# Altium PCB SLAVE_HW.PcbDoc (part 1 of 2)
Units mm, origin at the board's own origin, x right, y up, seen from the top; angles counter-clockwise.
Board outline 140 x 52 mm, 2 copper layers (Top Layer, Bottom Layer); 186 components, 129 nets, 475 pads, 0 vias.
Unrouted connection lines stored in the file: 330.
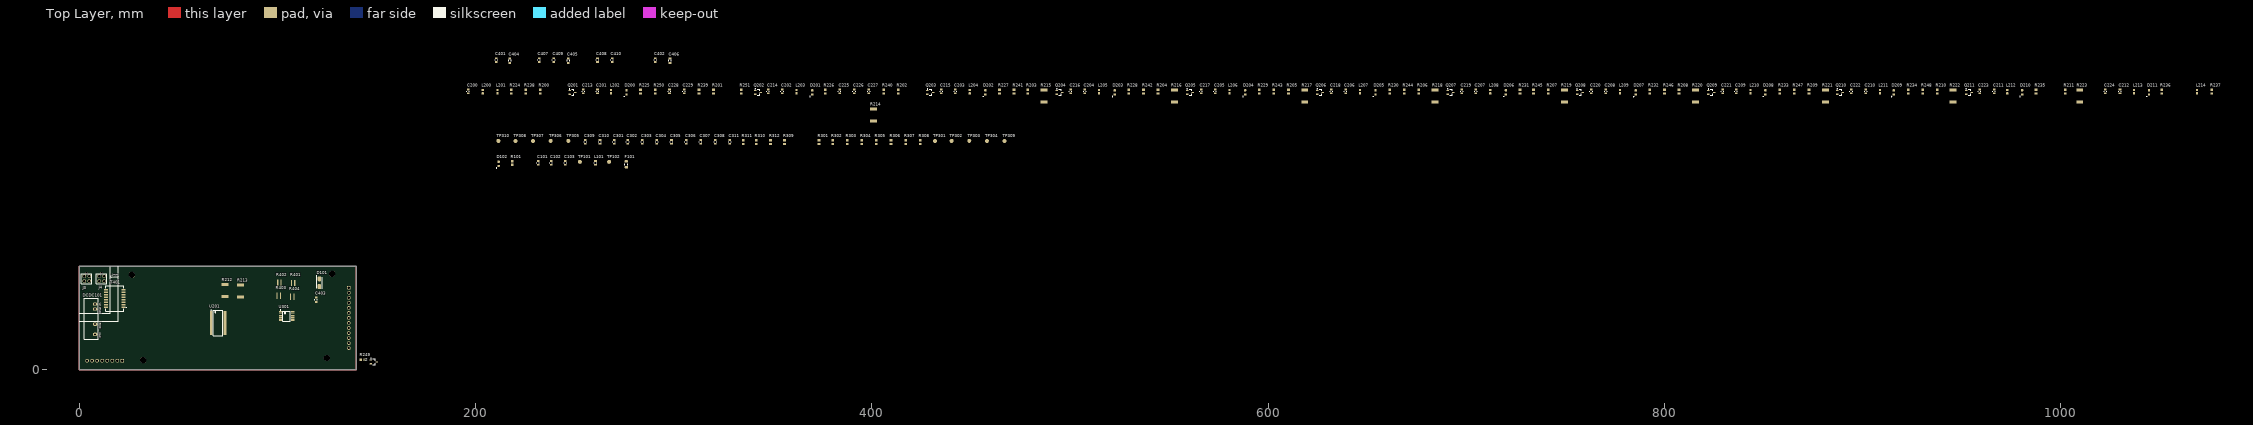
[diagram p0: Top Layer view]
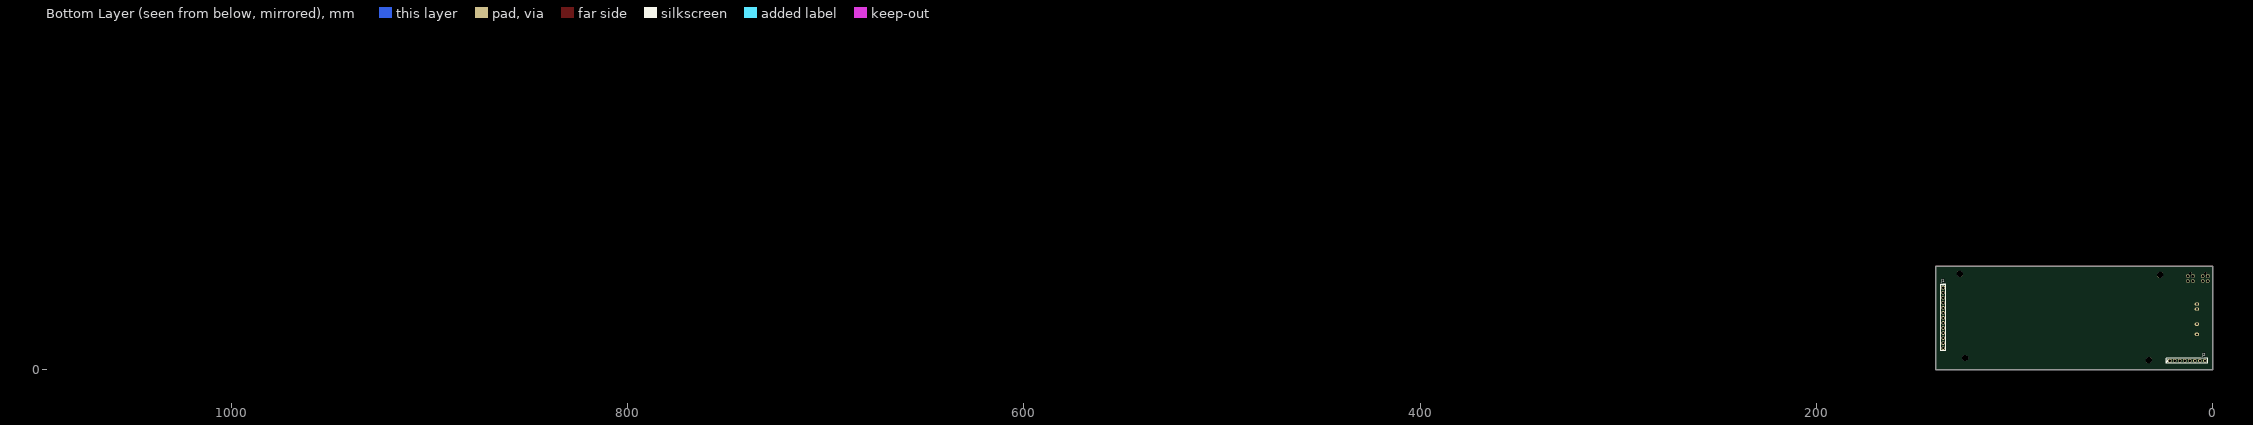
[diagram p1: Bottom Layer view, seen from below]

## Layer stack, top to bottom
Top Solder: solder mask 0.0102, Solder Resist, Dk 3.5
Top Layer: signal copper 0.0356
Dielectric 1: dielectric 0.32, FR-4, Dk 4.8
Bottom Layer: signal copper 0.0356
Bottom Solder: solder mask 0.0102, Solder Resist, Dk 3.5

## Board outline
0,0 140,0 140,52 0,52

## Design rules (kind name [scope] priority, off if disabled: settings)
Clearance [All] p1: gap=0.254 ignorepadtopadclearanceinfootprint=FALSE except(0: Arc-Hole Track-Hole SMDPad-Hole THPad-Hole Via-Hole Fill-Hole Poly-Hole Region-Hole Text-Hole)
PolygonConnect [All] p1: connectstyle=Relief reliefconductorwidth=0.254 reliefentries=4 polygonreliefangle="90 Angle" airgapwidth=0.254
RoutingVias [All] p1: holewidth=0.711 width=1.27 viastyle="Through Hole" minholewidth=0.711 minwidth=1.27 maxholewidth=0.711 maxwidth=1.27
SolderMaskExpansion [All] p1: expansion=0.102 istentingtop=FALSE
Width [All] p1: maxlimit=0.254 minlimit=0.254 preferedwidth=0.254
30 further rules are at their usual default settings.

## Classes and differential pairs
component class Temperatures: C301 C302 C303 C304 C305 C306 C307 C308 C309 C310 C311 R301 R302 R303 R304 R305 R306 R307 R308 R309 R310 R311 R312 TP301 TP302 TP303 TP304 TP305 TP306 TP307 TP308 TP309 TP310 U301
component class Supply: C101 C102 C103 D101 D102 DCDC101 F101 L101 R101 TP101 TP102
component class SLAVE_HW: J1 J2 J3 J4
component class Communication: C401 C402 C403 C404 C405 C406 C407 C408 C409 C410 R401 R402 R403 R404 T401
component class Balancing: 2 C200 C201 C202 C203 C204 C205 C206 C207 C208 C209 C210 C211 C212 C213 C214 C215 C216 C217 C218 C219 C220 C221 C222 C223 C224 C225 C226 C227 C228 C229 D200 D201 D202 D203 D204 D205 D206 D207 D208 D209 D210 D211 L200 L201 L202 L203 L204 L205 L206 L207 L208 L209 L210 L211 L212 L213 L214 Q202 Q204 Q206 Q208 Q210 R200 R201 R202 R203 R204 R205 R206 R207 R208 R209 R210 R211 R212 R213 R214 R215 R216 R217 R218 R219 R220 R221 R222 R223 R224 R225 R226 R227 R228 R229 R230 R231 R232 R233 R234 R235 R236 R237 R238 R239 R240 R241 R242 R243 R244 R245 R246 R247 R248 R250 R251 U201

## Components (designator, comment, footprint, x,y, rotation, side; value= is the part's Value field where it differs from the comment)
2 "BSS308PE" TRT-PCH-2/30-BSS 148.717,3.81 r0 top (schematic designator Q212)
C101 "4.7uF" C0805FNPC-R 231.648,104.306 r90 top
C102 "4.7uF" C0805FNPC-R 238.252,104.306 r90 top
C103 "4.7uF" C0805FNPC-R 245.364,104.306 r90 top
C200 "885012207092" C0805FNPC-R 196.342,140.335 r90 top
C201 "885012207092" C0805FNPC-R 261.62,140.335 r90 top
C202 "885012207092" C0805FNPC-R 354.838,140.335 r90 top
C203 "885012207092" C0805FNPC-R 442.214,140.335 r90 top
C204 "885012207092" C0805FNPC-R 507.492,140.335 r90 top
C205 "885012207092" C0805FNPC-R 573.278,140.335 r90 top
C206 "885012207092" C0805FNPC-R 639.064,140.335 r90 top
C207 "885012207092" C0805FNPC-R 704.85,140.335 r90 top
C208 "885012207092" C0805FNPC-R 770.382,140.335 r90 top
C209 "885012207092" C0805FNPC-R 836.168,140.335 r90 top
C210 "885012207092" C0805FNPC-R 901.573,140.335 r90 top
C211 "885012207092" C0805FNPC-R 966.343,140.335 r90 top
C212 "885012207092" C0805FNPC-R 1029.843,140.335 r90 top
C213 "885012207092" C0805FNPC-R 254.508,140.335 r90 top
C214 "885012207092" C0805FNPC-R 347.726,140.335 r90 top
C215 "885012207092" C0805FNPC-R 435.102,140.335 r90 top
C216 "885012207092" C0805FNPC-R 500.38,140.335 r90 top
C217 "885012207092" C0805FNPC-R 566.166,140.335 r90 top
C218 "885012207092" C0805FNPC-R 631.952,140.335 r90 top
C219 "885012207092" C0805FNPC-R 697.738,140.335 r90 top
C220 "885012207092" C0805FNPC-R 763.016,140.335 r90 top
C221 "885012207092" C0805FNPC-R 829.31,140.335 r90 top
C222 "885012207092" C0805FNPC-R 894.207,140.335 r90 top
C223 "885012207092" C0805FNPC-R 958.977,140.335 r90 top
C224 "885012207092" C0805FNPC-R 1022.477,140.335 r90 top
C225 "885012207103" C0805FNPC-R 383.794,140.335 r90 top
C226 "885012207103" C0805FNPC-R 391.16,140.335 r90 top
C227 "885012207103" C0805FNPC-R 398.526,140.335 r90 top
C228 "885012207098" C0805FNPC-R 297.942,140.335 r90 top
C229 "885012207092" C0805FNPC-R 305.308,140.335 r90 top
C301 "885012207098" C0805FNPC-R 270.002,114.847 r90 top
C302 "885012207098" C0805FNPC-R 276.86,114.847 r90 top
C303 "885012207098" C0805FNPC-R 284.226,114.847 r90 top
C304 "885012207098" C0805FNPC-R 291.592,114.847 r90 top
C305 "885012207098" C0805FNPC-R 298.958,114.847 r90 top
C306 "885012207098" C0805FNPC-R 306.324,114.847 r90 top
C307 "885012207098" C0805FNPC-R 313.69,114.847 r90 top
C308 "885012207098" C0805FNPC-R 321.056,114.847 r90 top
C309 "885012207092" C0805FNPC-R 255.524,114.847 r90 top
C310 "885012207103" C0805FNPC-R 262.89,114.847 r90 top
C311 "885012207103" C0805FNPC-R 328.422,114.847 r90 top
C401 "885012207092" C0805FNPC-R 210.566,156.083 r90 top
C402 "885012207092" C0805FNPC-R 290.83,156.083 r90 top
C403 "885012007057" C0805FNPC-W 119.634,35.179 r90 top
C404 "885012007057" C0805FNPC-W 217.424,155.829 r90 top
C405 "885012007057" C0805FNPC-W 246.888,155.829 r90 top
C406 "885012007057" C0805FNPC-W 298.196,155.829 r90 top
C407 "885012207092" C0805FNPC-R 232.156,156.083 r90 top
C408 "885012207092" C0805FNPC-R 261.62,156.083 r90 top
C409 "885012207092" C0805FNPC-R 239.522,156.083 r90 top
C410 "885012207092" C0805FNPC-R 268.986,156.083 r90 top
D101 "824501600" DTVS-DO-214AC 121.285,43.815 r90 top
D102 "150080GS75000" LED_0805_WE 211.709,103.798 r90 top
D200 "150080YS75000" LED_0805_WE 276.225,139.827 r90 top
D201 "150080YS75000" LED_0805_WE 369.951,139.827 r90 top
D202 "150080YS75000" LED_0805_WE 457.327,139.827 r90 top
D203 "150080YS75000" LED_0805_WE 522.605,139.827 r90 top
D204 "150080YS75000" LED_0805_WE 588.391,139.827 r90 top
D205 "150080YS75000" LED_0805_WE 654.177,139.827 r90 top
D206 "150080YS75000" LED_0805_WE 719.963,139.827 r90 top
D207 "150080YS75000" LED_0805_WE 785.495,139.827 r90 top
D208 "150080YS75000" LED_0805_WE 850.9,139.827 r90 top
D209 "150080YS75000" LED_0805_WE 915.67,139.827 r90 top
D210 "150080YS75000" LED_0805_WE 980.44,139.827 r90 top
D211 "150080YS75000" LED_0805_WE 1044.448,139.827 r90 top
DCDC101 "DCDC-5V/5V-0.2A" F_S-1WR3 8.128,25.4 r270 top
F101 "0437001.WRA" Fuse_1206 276.225,103.544 r90 top
J1 "61301311121" J_Pinheader_1x13 136.144,28.575 r180 bottom
J2 "61301211121" J_Pinheader_1x8 9.144,4.445 r90 bottom
J3 "J_NanoFit_2x2" J_NanoFit_2x2_v 3.937,46.565 r0 top
J4 "J_NanoFit_2x2" J_NanoFit_2x2_v 11.43,46.565 r0 top
L101 "L_Ferrite_Bread_6.8mH" C0805FNPC-R 260.604,104.306 r90 top
L200 "782853561" L_Ferrite_bead_0805 203.708,140.208 r90 top
L201 "782853561" L_Ferrite_bead_0805 211.074,140.208 r90 top
L202 "782853561" L_Ferrite_bead_0805 268.478,140.208 r90 top
L203 "782853561" L_Ferrite_bead_0805 362.077,140.208 r90 top
L204 "782853561" L_Ferrite_bead_0805 449.453,140.208 r90 top
L205 "782853561" L_Ferrite_bead_0805 514.731,140.208 r90 top
L206 "782853561" L_Ferrite_bead_0805 580.517,140.208 r90 top
L207 "782853561" L_Ferrite_bead_0805 646.303,140.208 r90 top
L208 "782853561" L_Ferrite_bead_0805 712.089,140.208 r90 top
L209 "782853561" L_Ferrite_bead_0805 777.621,140.208 r90 top
L210 "782853561" L_Ferrite_bead_0805 843.407,140.208 r90 top
L211 "782853561" L_Ferrite_bead_0805 908.685,140.208 r90 top
L212 "782853561" L_Ferrite_bead_0805 972.947,140.208 r90 top
L213 "782853561" L_Ferrite_bead_0805 1036.955,140.208 r90 top
L214 "782853561" L_Ferrite_bead_0805 1068.705,140.208 r90 top
Q201 "BSS308PE" TRT-PCH-2/30-BSS 248.92,139.827 r0 top
Q202 "BSS308PE" TRT-PCH-2/30-BSS 342.646,139.827 r0 top
Q203 "BSS308PE" TRT-PCH-2/30-BSS 429.514,139.827 r0 top
Q204 "BSS308PE" TRT-PCH-2/30-BSS 494.792,139.827 r0 top
Q205 "BSS308PE" TRT-PCH-2/30-BSS 560.578,139.827 r0 top
Q206 "BSS308PE" TRT-PCH-2/30-BSS 626.237,139.827 r0 top
Q207 "BSS308PE" TRT-PCH-2/30-BSS 692.023,139.827 r0 top
Q208 "BSS308PE" TRT-PCH-2/30-BSS 757.301,139.827 r0 top
Q209 "BSS308PE" TRT-PCH-2/30-BSS 823.595,139.827 r0 top
Q210 "BSS308PE" TRT-PCH-2/30-BSS 888.619,139.827 r0 top
Q211 "BSS308PE" TRT-PCH-2/30-BSS 953.643,139.827 r0 top
R101 "CR0805-JW-102ELF" R0805FTK 218.567,104.179 r90 top
R200 "CR0805-FX-4700GLF" R0805FTK 232.791,140.208 r90 top
R201 "CR0805-FX-4700GLF" R0805FTK 320.167,140.208 r90 top
R202 "CR0805-FX-4700GLF" R0805FTK 413.385,140.208 r90 top
R203 "CR0805-FX-4700GLF" R0805FTK 478.663,140.208 r90 top
R204 "CR0805-FX-4700GLF" R0805FTK 544.449,140.208 r90 top
R205 "CR0805-FX-4700GLF" R0805FTK 610.235,140.208 r90 top
R206 "CR0805-FX-4700GLF" R0805FTK 676.021,140.208 r90 top
R207 "CR0805-FX-4700GLF" R0805FTK 741.299,140.208 r90 top
R208 "CR0805-FX-4700GLF" R0805FTK 807.339,140.208 r90 top
R209 "CR0805-FX-4700GLF" R0805FTK 872.871,140.208 r90 top
R210 "CR0805-FX-4700GLF" R0805FTK 937.641,140.208 r90 top
R211 "CR0805-FX-4700GLF" R0805FTK 1002.157,140.208 r90 top
R212 "352115RFT" R2512FTK 73.66,39.83 r90 top value=15R
R213 "352115RFT" R2512FTK 81.407,39.576 r90 top value=15R
R214 "352115RFT" R2512FTK 400.812,128.397 r90 top value=15R
R215 "352115RFT" R2512FTK 486.918,138.049 r90 top value=15R
R216 "352115RFT" R2512FTK 552.704,138.049 r90 top value=15R
R217 "352115RFT" R2512FTK 618.49,138.049 r90 top value=15R
R218 "352115RFT" R2512FTK 684.276,138.049 r90 top value=15R
R219 "352115RFT" R2512FTK 749.554,138.049 r90 top value=15R
R220 "352115RFT" R2512FTK 815.594,138.049 r90 top value=15R
R221 "352115RFT" R2512FTK 881.126,138.049 r90 top value=15R
R222 "352115RFT" R2512FTK 945.515,138.049 r90 top value=15R
R223 "352115RFT" R2512FTK 1009.523,138.049 r90 top value=15R
R224 "CR0805-FX-1000ELF" R0805FTK 218.059,140.208 r90 top
R225 "CR0805-FX-1000ELF" R0805FTK 283.337,140.208 r90 top
R226 "CR0805-FX-1000ELF" R0805FTK 376.555,140.208 r90 top
R227 "CR0805-FX-1000ELF" R0805FTK 464.439,140.208 r90 top
R228 "CR0805-FX-1000ELF" R0805FTK 529.717,140.208 r90 top
R229 "CR0805-FX-1000ELF" R0805FTK 595.503,140.208 r90 top
R230 "CR0805-FX-1000ELF" R0805FTK 661.289,140.208 r90 top
R231 "CR0805-FX-1000ELF" R0805FTK 727.075,140.208 r90 top
R232 "CR0805-FX-1000ELF" R0805FTK 792.607,140.208 r90 top
R233 "CR0805-FX-1000ELF" R0805FTK 858.139,140.208 r90 top
R234 "CR0805-FX-1000ELF" R0805FTK 922.909,140.208 r90 top
R235 "CR0805-FX-1000ELF" R0805FTK 987.425,140.208 r90 top
R236 "CR0805-FX-1000ELF" R0805FTK 1050.925,140.208 r90 top
R237 "CR0805-FX-1000ELF" R0805FTK 1076.071,140.208 r90 top
R238 "CR0805-JW-102ELF" R0805FTK 225.425,140.208 r90 top
R239 "CR0805-JW-102ELF" R0805FTK 312.801,140.208 r90 top
R240 "CR0805-JW-102ELF" R0805FTK 406.019,140.208 r90 top
R241 "CR0805-JW-102ELF" R0805FTK 471.805,140.208 r90 top
R242 "CR0805-JW-102ELF" R0805FTK 537.083,140.208 r90 top
R243 "CR0805-JW-102ELF" R0805FTK 602.869,140.208 r90 top
R244 "CR0805-JW-102ELF" R0805FTK 668.655,140.208 r90 top
R245 "CR0805-JW-102ELF" R0805FTK 733.933,140.208 r90 top
R246 "CR0805-JW-102ELF" R0805FTK 799.973,140.208 r90 top
R247 "CR0805-JW-102ELF" R0805FTK 865.505,140.208 r90 top
R248 "CR0805-JW-102ELF" R0805FTK 930.275,140.208 r90 top
R249 "CR0805-JW-102ELF" R0805FTK 143.129,4.953 r0 top
R250 "CR0805-JW-102ELF" R0805FTK 290.703,140.208 r90 top
R251 "CR0805-JW-102ELF" R0805FTK 334.137,140.208 r90 top
R301 "CR0805-JW-103ELF" R0805FTK 373.38,114.72 r90 top
R302 "CR0805-JW-103ELF" R0805FTK 380.238,114.72 r90 top
R303 "CR0805-JW-103ELF" R0805FTK 387.604,114.72 r90 top
R304 "CR0805-JW-103ELF" R0805FTK 394.97,114.72 r90 top
R305 "CR0805-JW-103ELF" R0805FTK 402.336,114.72 r90 top
R306 "CR0805-JW-103ELF" R0805FTK 409.702,114.72 r90 top
R307 "CR0805-JW-103ELF" R0805FTK 417.068,114.72 r90 top
R308 "CR0805-JW-103ELF" R0805FTK 424.434,114.72 r90 top
R309 "CR0805-JW-103ELF" R0805FTK 355.981,114.72 r90 top
R310 "CR0805-JW-103ELF" R0805FTK 341.757,114.72 r90 top
R311 "CR0805-JW-103ELF" R0805FTK 335.153,114.72 r90 top
R312 "CR0805-FX-1000ELF" R0805FTK 348.869,114.72 r90 top
R401 "47R" "R0612 normal" 107.989,43.688 r0 top
R402 "47R" "R0612 normal" 101.092,43.815 r0 top
R403 "47R" "R0612 normal" 100.799,37.211 r0 top
R404 "47R" "R0612 normal" 107.608,36.703 r0 top
T401 "7490140117C" 7490140117C 18.034,35.814 r90 top
TP101 "TestPoint" TestPoint 252.73,104.814 r90 top
TP102 "TestPoint" TestPoint 267.462,104.814 r90 top
TP301 "TestPoint" TestPoint 431.927,115.355 r90 top
TP302 "TestPoint" TestPoint 440.309,115.355 r90 top
TP303 "TestPoint" TestPoint 449.199,115.355 r90 top
TP304 "TestPoint" TestPoint 458.089,115.355 r90 top
TP305 "TestPoint" TestPoint 246.888,115.355 r90 top
TP306 "TestPoint" TestPoint 237.998,115.355 r90 top
TP307 "TestPoint" TestPoint 229.108,115.355 r90 top
TP308 "TestPoint" TestPoint 220.218,115.355 r90 top
TP309 "TestPoint" TestPoint 466.979,115.355 r90 top
TP310 "TestPoint" TestPoint 211.582,115.355 r90 top
U201 "LTC6811-1" U_LTC6811G-2 70.175,23.475 r0 top
U301 "CD4051B-Q1" CD4051B-Q1 104.775,26.924 r0 top

## Footprints (in the part's own frame and the unit in brackets; to place one, negate y for a bottom-side part, rotate by r counter-clockwise, add the part's x,y. Pads: shape width x height; smd on the part's side, far side on the other; paste and mask are expansions set on the pad)
7490140117C [mm] "SMD LAN Transformers, body 12.7x8.8mm, 16-Leads"
  rect 0.76x1.9 smd: 1(-4.445,-4.4) 2(-3.175,-4.4) 3(-1.905,-4.4) 4(-0.635,-4.4) 5(0.635,-4.4) 6(1.905,-4.4) 7(3.175,-4.4) 8(4.445,-4.4) 9(4.445,4.4) 10(3.175,4.4) 11(1.905,4.4) 12(0.635,4.4) 13(-0.635,4.4) 14(-1.905,4.4) 15(-3.175,4.4) 16(-4.445,4.4)
  silkscreen extent -6.48,-5.92 6.48,4.52, body extent -6.35,-4.7 6.35,4.7, height 5.8
C0805FNPC-R [mm]
  rect 0.9x1.3 smd: 1(-0.95,0) 2(0.95,0)
  silkscreen extent -0.15,-0.65 0.15,0.65, body extent -1.03,-0.63 0.97,0.63, height 0.96
C0805FNPC-W [mm]
  rect 0.9x1.3 smd: 1(-1.15,0) 2(1.15,0)
  silkscreen extent -0.35,-0.65 0.35,0.65, body extent -1,-0.63 1,0.63, height 0.96
CD4051B-Q1 [mm]
  rect 1.6x0.45 smd: 1(-3.05,2.275) 2(-3.05,1.625) 3(-3.05,0.975) 4(-3.05,0.325) 5(-3.05,-0.325) 6(-3.05,-0.975) 7(-3.05,-1.625) 8(-3.05,-2.275) 9(3.05,-2.275) 10(3.05,-1.625) 11(3.05,-0.975) 12(3.05,-0.325) 13(3.05,0.325) 14(3.05,0.975) 15(3.05,1.625) 16(3.05,2.275)
  silkscreen extent -3.17,-2.55 1.85,3.17, body extent -3.2,-2.55 3.2,2.55, height 1.2
DTVS-DO-214AC [mm] "Molded Diode, 2-Leads, Body 5,11x2,67mm, IPC Medium Density"
  rrect50% 2.5x1.7 smd: 1(-1.975,0) 2(1.975,0)
  silkscreen extent -2.7,-1.4 3.47,1.52, body extent -2.56,-1.34 2.56,1.34, height 2.5
F_S-1WR3 [mm]
  oval 1.6x2.3 hole 1: 1(-7.62,0) 2(-5.08,0) 5(2.54,0) 7(7.62,0)
  silkscreen extent -10.47,-5.6 10.17,1.7, body extent -9.95,-5.12 9.7,0.88, height 10.16
Fuse_1206 [mm] "Chip Resistor, 2-Leads, Body 3,20x1,58mm, IPC Medium Density"
  rrect50% 1.25x1.75 smd: 1(-1.425,0) 2(1.425,0)
  silkscreen extent -0.4,-0.77 0.4,0.77, body extent -1.6,-0.79 1.6,0.79, height 0.86
J_NanoFit_2x2_v [mm]
  round 1.8 hole 1.2: 1(1.27,0.552) 3(1.23,-1.949) 4(-1.27,-1.949)
  rect 1.6x1.6 hole 1.2: 2(-1.27,0.552)
  round 1.4 hole 1.4: 5(0,1.949)
  silkscreen extent -2.79,-3.2 2.54,1.8, body extent -3.02,-3.61 2.92,5.23, height 9.92
J_Pinheader_1x8 [mm]
  rrect50% 1.8x1.8 hole 1.1: 1(0,12.7)
  round 1.8 hole 1.1: 2(0,10.16) 3(0,7.62) 4(0,5.08) 5(0,2.54) 6(0,0) 7(0,-2.54) 8(0,-5.08)
  silkscreen extent -1.27,-6.5 1.27,14.5, body extent -1.26,-6.32 1.28,14, height 8.77
J_Pinheader_1x13 [mm]
  rrect50% 1.8x1.8 hole 1.1: 1(0,12.7)
  round 1.8 hole 1.1: 2(0,10.16) 3(0,7.62) 4(0,5.08) 5(0,2.54) 6(0,0) 7(0,-2.54) 8(0,-5.08) 9(0,-7.62) 10(0,-10.16) 11(0,-12.7) 12(0,-15.24) 13(0,-17.78)
  silkscreen extent -1.27,-19.04 1.27,14.5, body extent -1.27,-19.05 1.27,13.97, height 8.57
L_Ferrite_bead_0805 [mm] "Chip Inductor, 2-Leads, Body 1,60x0,80mm, IPC Low Density"
  rrect50% 1.22x1.08 smd: 1(-0.84,0) 2(0.84,0)
  body extent -0.88,-0.48 0.87,0.47, height 0.65
LED_0805_WE [mm] "SODFL, 2-Leads, Body 1,60x3,20mm, IPC Medium Density"
  rrect50% 1.1x1.2 smd: A(1.05,0) K(-1.05,0)
  silkscreen extent -2.15,1.05 -2.05,1.15, body extent -1,-0.62 1,0.63, height 0.7
"R0612 normal" [mm]
  rect 0.6x3.2 smd: 1(-0.85,0) 2(0.85,0)
  body extent -1.11,-1.6 1.11,1.6, height 0.75
R0805FTK [mm] "Chip Resistor, 2-Leads, Body 2,00x1,25mm, IPC Medium Density"
  rect 1.15x1.35 smd: 1(-0.925,0) 2(0.925,0)
  body extent -1,-0.63 1,0.63, height 0.65
R2512FTK [mm]
  rect 1.5x3.5 smd: 1(-3,0) 2(3,0)
  body extent -3.15,-1.6 3.15,1.6, height 0.66
TestPoint [mm]
  round 2 smd: 1(0,0)
TRT-PCH-2/30-BSS [mm] "SOT23, 3-Leads, Body 2,90x2,80mm, Pitch 0,95mm, IPC Low Density"
  rrect50% 1.25x0.65 smd: D(1.425,0) G(-1.425,0.95) S(-1.425,-0.95)
  silkscreen extent -1.55,-1.5 0.8,1.95, body extent -1.4,-1.45 1.4,1.45, height 1.06
U_LTC6811G-2 [mm] "SSOP, 48-Leads, Body 12,80x5,30mm, Pitch 0,50mm, IPC Medium Density"
  rrect50% 1.37x0.3 smd: 1(-3.5,5.75) 2(-3.5,5.25) 3(-3.5,4.75) 4(-3.5,4.25) 5(-3.5,3.75) 6(-3.5,3.25) 7(-3.5,2.75) 8(-3.5,2.25) 9(-3.5,1.75) 10(-3.5,1.25) 11(-3.5,0.75) 12(-3.5,0.25) 13(-3.5,-0.25) 14(-3.5,-0.75) 15(-3.5,-1.25) 16(-3.5,-1.75) 17(-3.5,-2.25) 18(-3.5,-2.75) 19(-3.5,-3.25) 20(-3.5,-3.75) 21(-3.5,-4.25) 22(-3.5,-4.75) 23(-3.5,-5.25) 24(-3.5,-5.75) 25(3.5,-5.75) 26(3.5,-5.25) 27(3.5,-4.75) 28(3.5,-4.25) 29(3.5,-3.75) 30(3.5,-3.25) 31(3.5,-2.75) 32(3.5,-2.25) 33(3.5,-1.75) 34(3.5,-1.25) 35(3.5,-0.75) 36(3.5,-0.25) 37(3.5,0.25) 38(3.5,0.75) 39(3.5,1.25) 40(3.5,1.75) 41(3.5,2.25) 42(3.5,2.75) 43(3.5,3.25) 44(3.5,3.75) 45(3.5,4.25) 46(3.5,4.75) 47(3.5,5.25) 48(3.5,5.75)
  silkscreen extent -3.62,-6.55 2.4,6.57, body extent -3.9,-6.4 3.9,6.4, height 2

## Part data
2 Q201 Q202 Q203 Q204 Q205 Q206 Q207 Q208 Q209 Q210 Q211: library part TRT-PCH-2/30-BSS, "Infineon’s highly innovative OptiMOS™ families include p-channel power MOSFETs, SOT-23-3, RoHS", Case/Package=TO-236-3, Continuous Drain Current (ID)=2A, Drain to Source Voltage (Vdss)=30V, Gate to Source Voltage (Vgs)=20V, Input Capacitance=500pF, Manufacturer=Infineon, Manufacturer Part Number=BSS308PEH6327, Max Operating Temperature=150°C, Max Power Dissipation=500mW, Min Operating Temperature=-55°C, Package Quantity=1, Supplier Part Number 1=8235500, Threshold Voltage=-1.5V, .Creator=DO, Category=MOSFETs, ComponentLink1Description=datasheet, ComponentLink1URL=https://datasheet.ciiva.com/6379/infineon-bss308pe-ds-v02-03-en-6379920.pdf?src-supplier=Digi-Key, ComponentLink2Description=https://datasheet.ciiva.com/11171/infineon-bss308pe-ds-v02-03-en-11171385.pdf?src-supplier=Avnet, ComponentLink2URL=https://datasheet.ciiva.com/11171/infineon-bss308pe-ds-v02-03-en-11171385.pdf?src-supplier=Avnet, Fall Time=2.8ns, Mount="Surface Mount", Number of Pins=3, Packaging="Tape and Reel", Pricing 1="50=0,50300, 100=0,26400, 250=0,25900, 500=0,25200, 1000=0,24700 (USD)", Rds On Max=80mR, REACH SVHC="No SVHC", Rise Time=7.7ns, RoHS=Yes, Series=OptiMOS™, Stock 1=4000, Supplier 1=RSComponents, Turn-Off Delay Time=15.3ns, Turn-On Delay Time=5.6ns
C101 C102 C103: library part C4.7uF-25V, "Multilayer Ceramic Capacitor, Wcap-Csgp Series, 4.7 F, 20%, X5R, 25 V, 0805 [2012 Metric] Rohs Compliant: Yes", Manufacturer="Wurth Electronics", Manufacturer Part Number=885012107018, Supplier Part Number 1=1813478, Category="Ceramic Capacitors", ComponentLink1Description=http://www.farnell.com/datasheets/1958455.pdf?src-supplier=Farnell, ComponentLink1URL=http://www.farnell.com/datasheets/1958455.pdf?src-supplier=Farnell, ComponentLink2Description=http://www.farnell.com/datasheets/1958455.pdf?src-supplier=Element14, ComponentLink2URL=http://www.farnell.com/datasheets/1958455.pdf?src-supplier=Element14, ComponentLink3Description=http://www.farnell.com/datasheets/1958455.pdf?src-supplier=Newark, ComponentLink3URL=http://www.farnell.com/datasheets/1958455.pdf?src-supplier=Newark, ComponentLink4Description=https://katalog.we-online.de/pbs/datasheet/885012107018.pdf?src-supplier=Digi-Key, ComponentLink4URL=https://katalog.we-online.de/pbs/datasheet/885012107018.pdf?src-supplier=Digi-Key, Pricing 1="50=0,141, 500=0,093, 1500=0,088 (EUR)", RoHS=Yes, Stock 1=1051, Supplier 1=Rs
C200 C201 C202 C203 C204 C205 C206 C207 C208 C209 C210 C211 C212 C213 C214 C215 C216 C217 C218 C219 C220 C221 C222 C223 C224 C229 C309 C401 C402 C407 C408 C409 C410: library part C10n-50V-0805FNPC-X7R, "Cap, 0.01ΜF, 50V, 10%, X7R, 0805", Capacitance=10nF, Case Code (Imperial)=0805, Case Code (Metric)=2012, Dielectric=X7R, Manufacturer 1="Wurth Electronics", Max Operating Temperature=125°C, Min Operating Temperature=-55°C, Supplier Part Number 1=1813941, Tolerance=10%, Voltage Rating=50V, .Creator=DR, Case/Package=0805, Category="Ceramic Capacitors", ComponentLink1Description=http://www.farnell.com/datasheets/1958497.pdf?src-supplier=Farnell, ComponentLink1URL=http://www.farnell.com/datasheets/1958497.pdf?src-supplier=Farnell, ComponentLink2Description=http://www.farnell.com/datasheets/1958497.pdf?src-supplier=Element14, ComponentLink2URL=http://www.farnell.com/datasheets/1958497.pdf?src-supplier=Element14, ComponentLink3Description=http://www.farnell.com/datasheets/1958497.pdf?src-supplier=Newark, ComponentLink3URL=http://www.farnell.com/datasheets/1958497.pdf?src-supplier=Newark, ComponentLink4Description=https://katalog.we-online.de/pbs/datasheet/885012207092.pdf?src-supplier=Digi-Key, ComponentLink4URL=https://katalog.we-online.de/pbs/datasheet/885012207092.pdf?src-supplier=Digi-Key, Length=0.079inch, Manufacturer Part Number 1=885012207092, Mount="Surface Mount", Packaging="Cut Tape", Pricing 1="4000=0,03200, 12000=0,03100 (USD)", REACH SVHC=Unknown, RoHS=Yes, RoHS Compliant=Yes, Stock 1=1, Supplier 1=RSComponents, Thickness=0.035inch, Voltage Rating (DC)=50V, Width=0.049inch
C225 C226 C227 C310 C311: library part C1u-50V-0805FNPC-X7R, "Multilayer Ceramic Capacitor, Wcap-Csgp Series, 1 F, 10%, X7R, 50 V, 0805 [2012 Metric] Rohs Compliant: Yes", Capacitance=1uF, Case Code (Imperial)=0805, Case Code (Metric)=2012, Dielectric=X7R, Manufacturer 1="Wurth Electronics", Max Operating Temperature=85°C, Min Operating Temperature=-55°C, Supplier Part Number 1=1813523, Tolerance=10%, Voltage Rating=50V, .Creator=GP, Case/Package=0805, Category="Ceramic Capacitors", ComponentLink1Description=http://www.farnell.com/datasheets/1958501.pdf?src-supplier=Farnell, ComponentLink1URL=http://www.farnell.com/datasheets/1958501.pdf?src-supplier=Farnell, ComponentLink2Description=http://www.farnell.com/datasheets/1958501.pdf?src-supplier=Element14, ComponentLink2URL=http://www.farnell.com/datasheets/1958501.pdf?src-supplier=Element14, ComponentLink3Description=https://katalog.we-online.de/pbs/datasheet/885012107003.pdf?src-supplier=Digi-Key, ComponentLink3URL=https://katalog.we-online.de/pbs/datasheet/885012107003.pdf?src-supplier=Digi-Key, ComponentLink4Description=http://www.farnell.com/datasheets/1958501.pdf?src-supplier=Newark, ComponentLink4URL=http://www.farnell.com/datasheets/1958501.pdf?src-supplier=Newark, Length=0.079inch, Manufacturer Part Number 1=885012207103, Mount="Surface Mount", Packaging="Cut Tape", Pricing 1="50=0,27200, 250=0,25300, 500=0,22800, 1250=0,20100, 2500=0,17100 (GBP)", REACH SVHC=Unknown, RoHS=Yes, RoHS Compliant=Yes, Stock 1=5100, Supplier 1=RSComponents, Thickness=0.053inch, Voltage Rating (DC)=50V, Width=0.049inch
C228 C301 C302 C303 C304 C305 C306 C307 C308: library part C100n-50V-0805FNPC-X7R, "Cap, 0.1ΜF, 50V, 10%, X7R, 0805", Capacitance=100nF, Case Code (Imperial)=0805, Case Code (Metric)=2012, Dielectric=X7R, Manufacturer 1="Wurth Electronics", Max Operating Temperature=125°C, Min Operating Temperature=-55°C, Supplier Part Number 1=1813493, Tolerance=10%, Voltage Rating=50V, .Creator=DR, Case/Package=0805, Category="Ceramic Capacitors", ComponentLink1Description=http://www.farnell.com/datasheets/1958498.pdf?src-supplier=Farnell, ComponentLink1URL=http://www.farnell.com/datasheets/1958498.pdf?src-supplier=Farnell, ComponentLink2Description=http://www.farnell.com/datasheets/1958498.pdf?src-supplier=Element14, ComponentLink2URL=http://www.farnell.com/datasheets/1958498.pdf?src-supplier=Element14, ComponentLink3Description=https://katalog.we-online.de/pbs/datasheet/885012207098.pdf?src-supplier=Digi-Key, ComponentLink3URL=https://katalog.we-online.de/pbs/datasheet/885012207098.pdf?src-supplier=Digi-Key, ComponentLink4Description=http://www.farnell.com/datasheets/1958498.pdf?src-supplier=Newark, ComponentLink4URL=http://www.farnell.com/datasheets/1958498.pdf?src-supplier=Newark, Length=0.079inch, Manufacturer Part Number 1=885012207098, Mount="Surface Mount", Packaging="Cut Tape", Pricing 1="100=0,10200, 500=0,07100, 2000=0,06100 (GBP)", REACH SVHC=Unknown, RoHS=Yes, RoHS Compliant=Yes, Stock 1=8000, Supplier 1=RSComponents, Thickness=0.035inch, Voltage Rating (DC)=50V, Width=0.049inch
C403 C404 C405 C406: library part C100p-50V-0805FNPC-C0G/NP0, "Multilayer Ceramic Capacitor, Wcap-Csgp Series, 100 Pf, 5%, C0G / Np0, 50 V, 0805 [2012 Metric] Rohs Compliant: Yes", Capacitance=100pF, Case Code (Imperial)=0805, Case Code (Metric)=2012, Dielectric=C0G, Manufacturer="Wurth Electronics", Max Operating Temperature=125°C, Min Operating Temperature=-55°C, Supplier Part Number 1=1813930, Tolerance=5%, Voltage Rating=50V, .Creator=DR, Case/Package=0805, Category="Ceramic Capacitors", ComponentLink1Description=http://www.farnell.com/datasheets/1958443.pdf?src-supplier=Farnell, ComponentLink1URL=http://www.farnell.com/datasheets/1958443.pdf?src-supplier=Farnell, ComponentLink2Description=https://katalog.we-online.de/pbs/datasheet/885012007057.pdf?src-supplier=Digi-Key, ComponentLink2URL=https://katalog.we-online.de/pbs/datasheet/885012007057.pdf?src-supplier=Digi-Key, ComponentLink3Description=http://www.farnell.com/datasheets/1958443.pdf?src-supplier=Element14, ComponentLink3URL=http://www.farnell.com/datasheets/1958443.pdf?src-supplier=Element14, ComponentLink4Description=http://www.farnell.com/datasheets/1958443.pdf?src-supplier=Newark, ComponentLink4URL=http://www.farnell.com/datasheets/1958443.pdf?src-supplier=Newark, ComponentLink5Description="Where buy it", ComponentLink5URL=https://www.we-online.com/catalog/en/WCAP-CSGP-50VDC#885012007057, Length=0.079inch, Manufacturer Part Number=885012007057, Mount="Surface Mount", Packaging="Cut Tape", Pricing 1="4000=0,03900, 12000=0,03800 (USD)", REACH SVHC=Unknown, RoHS=Yes, RoHS Compliant=Yes, Stock 1=1, Supplier 1=RSComponents, Thickness=0.035inch, Voltage Rating (DC)=50V, Width=0.049inch
D101: library part DTVS-6V-DO-214AC, "TVS diode [Würth Elektronik] 824501600 TVS diode", Clamping Voltage=10.3V, Manufacturer="Wurth Electronics", Max Breakdown Voltage=7.02V, Max Operating Temperature=150°C, Min Operating Temperature=-65°C, Peak Pulse Current=38.8A, Peak Pulse Power=400W, Power Line Protection=No, Resistor Type=Zener, Reverse Standoff Voltage=6V, Supplier Part Number 1=710-824501600, .Creator=DO, Category="TVS Diodes", ComponentLink1Description="Where buy it", ComponentLink1URL=https://www.we-online.com/catalog/en/WE-TVSP?sq=824501600#824501600, ComponentLink2Description=http://www.farnell.com/datasheets/2036401.pdf?src-supplier=Element14, ComponentLink2URL=http://www.farnell.com/datasheets/2036401.pdf?src-supplier=Element14, ComponentLink3Description=https://katalog.we-online.de/pbs/datasheet/824501600.pdf?src-supplier=Digi-Key, ComponentLink3URL=https://katalog.we-online.de/pbs/datasheet/824501600.pdf?src-supplier=Digi-Key, Manufacturer Part Number=824501600, Min Breakdown Voltage=7.02V, Mount="Surface Mount", Number of Bidirectional Channels=1, Number of Pins=2, Packaging="Cut Tape", Polarity=Bidirectional, Pricing 1="1=0,28000, 10=0,26100, 50=0,26100, 100=0,23400, 500=0,20400, 1000=0,17400, 10000=0,17400 (USD)", REACH SVHC=Unknown, RoHS=Yes, RoHS Compliant=Yes, Stock 1=780, Supplier 1=Mouser
D102: library part LEDGS-0805-450, "Led, Green, 520 Nm, 3.2 V, 30 Ma, 450 Mcd Rohs Compliant: Yes", Case Code (Imperial)=0805, Case Code (Metric)=2012, Color=Green, Forward Current=30mA, Forward Voltage=3.2V, Manufacturer 1="Wurth Electronics", Max Operating Temperature=85°C, Min Operating Temperature=-40°C, Package Quantity=4000, Supplier Part Number 1=8154221, Test Current=20mA, .Creator=GP, Case/Package=0805, Category=LEDs, ComponentLink1Description=Datasheet, ComponentLink1URL=https://www.we-online.com/catalog/datasheet/150080GS75000.pdf, ComponentLink2Description="Where buy it", ComponentLink2URL=https://katalog.we-online.de/en/led/WL-SMCW/150080GS75000, ComponentLink3Description=https://datasheet.ciiva.com/29563/150080gs75000-29563008.pdf?src-supplier=Digi-Key, ComponentLink3URL=https://datasheet.ciiva.com/29563/150080gs75000-29563008.pdf?src-supplier=Digi-Key, ComponentLink4Description=https://datasheet.ciiva.com/29279/759434-da-01-en-chipled-0805-w-kl-gruen-150080gs75000-29279039.pdf?src-supplier=Conrad, ComponentLink4URL=https://datasheet.ciiva.com/29279/759434-da-01-en-chipled-0805-w-kl-gruen-150080gs75000-29279039.pdf?src-supplier=Conrad, Dominant Wavelength=520nm, Height=0.7mm, Length=2mm, Lens Style=Clear,Rectangular, Luminous Intensity=450mcd, Manufacturer Part Number 1=150080GS75000, Mount="Surface Mount", Packaging="Cut Tape", Pricing 1="50=0,19300, 500=0,12900, 1000=0,12300, 2000=0,11700, 4000=0,11100 (USD)", REACH SVHC=Unknown, RoHS=Yes, RoHS Compliant=Yes, Stock 1=4350, Supplier 1=RSComponents, Viewing Angle=140°, Wavelength=520nm, Width=1.25mm
D200 D201 D202 D203 D204 D205 D206 D207 D208 D209 D210 D211: library part LEDYS-0805-120, "2 V Yellow LED 2012 (0805) SMD, Wurth Elektronik WL-SMCW 150080YS75000", Case Code (Imperial)=0805, Case Code (Metric)=2012, Color=Yellow, Forward Current=30mA, Forward Voltage=2V, Manufacturer 1="Wurth Electronics", Max Operating Temperature=85°C, Min Operating Temperature=-40°C, Package Quantity=4000, Supplier Part Number 1=8154231, Test Current=20mA, .Creator=DR, Case/Package=0805, Category=LEDs, ComponentLink1Description=Datasheet, ComponentLink1URL=https://www.we-online.com/catalog/datasheet/150080YS75000.pdf, ComponentLink2Description="Where buy it", ComponentLink2URL=https://katalog.we-online.de/en/led/WL-SMCW/150080YS75000, ComponentLink3Description=https://datasheet.ciiva.com/23843/150080ys75000-23843256.pdf?src-supplier=Newark, ComponentLink3URL=https://datasheet.ciiva.com/23843/150080ys75000-23843256.pdf?src-supplier=Newark, ComponentLink4Description=https://datasheet.ciiva.com/29279/759438-da-01-en-chipled-0805-w-kl-gelb-150080ys75000-29279034.pdf?src-supplier=Conrad, ComponentLink4URL=https://datasheet.ciiva.com/29279/759438-da-01-en-chipled-0805-w-kl-gelb-150080ys75000-29279034.pdf?src-supplier=Conrad, ComponentLink5Description=https://datasheet.ciiva.com/22656/1911353-22656971.pdf?src-supplier=Element14, ComponentLink5URL=https://datasheet.ciiva.com/22656/1911353-22656971.pdf?src-supplier=Element14, ComponentLink6Description=https://datasheet.ciiva.com/29563/150080ys75000-29563019.pdf?src-supplier=Digi-Key, ComponentLink6URL=https://datasheet.ciiva.com/29563/150080ys75000-29563019.pdf?src-supplier=Digi-Key, ComponentLink7Description=https://datasheet.ciiva.com/29563/150080ys75000-29563020.pdf?src-supplier=Digi-Key, ComponentLink7URL=https://datasheet.ciiva.com/29563/150080ys75000-29563020.pdf?src-supplier=Digi-Key, ComponentLink8Description=https://datasheet.ciiva.com/29563/150080ys75000-29563021.pdf?src-supplier=Digi-Key, ComponentLink8URL=https://datasheet.ciiva.com/29563/150080ys75000-29563021.pdf?src-supplier=Digi-Key, Dominant Wavelength=590nm, Height=0.7mm, Length=2mm, Lens Style=Clear,Rectangular, Luminous Intensity=120mcd, Manufacturer Part Number 1=150080YS75000, Mount="Surface Mount", Packaging="Tape and Reel", Pricing 1="50=0,19300, 500=0,12900, 750=0,12300, 1500=0,11700, 3000=0,11100 (USD)", REACH SVHC=Unknown, RoHS=Yes, RoHS Compliant=Yes, Stock 1=2100, Supplier 1=RSComponents, Viewing Angle=140°, Wavelength=590nm, Width=1.25mm
DCDC101: "Module DC-DC 5VIN 1-OUT 5V 0.2A 1W 4-Pin SIP Module Bag", Manufacturer=MORNSUN, Manufacturer Part Number=F0505S-1WR3, Supplier Part Number 1=2725-F0505S-1WR3-ND, Category="Board Mount Modules", ComponentLink1Description="New link", Pricing 1="1=2,32, 5=2,288, 10=2,255, 25=2,1884, 50=2,1222, 100=2,0559, 250=1,98956, 500=1,85692 (USD)", RoHS=No, Stock 1=23492, Supplier 1=Digi-Key
F101: library part Fuse_1A_63V_1206, "Fuse Chip Fast Acting 1A 63V SMD Solder Pad 1206 Ceramic T/R Automotive", Case Code (Imperial)=1206, Case Code (Metric)=3216, Current Rating=1A, Manufacturer=Littelfuse, Max Operating Temperature=150°C, Min Operating Temperature=-55°C, Supplier Part Number 1=F10001CT-ND, Voltage Rating (AC)=63V, .Creator=DO, Approvals=CSA,cURus, Case/Package=1206, Category=Fuses, ComponentLink1Description=https://www.littelfuse.com/~/media/electronics/datasheets/fuses/littelfuse_fuse_437a_datasheet.pdf.pdf?src-supplier=Digi-Key, ComponentLink1URL=https://www.littelfuse.com/~/media/electronics/datasheets/fuses/littelfuse_fuse_437a_datasheet.pdf.pdf?src-supplier=Digi-Key, ComponentLink2Description="Where buy it", ComponentLink2URL=https://www.mouser.es/ProductDetail/Littelfuse/0437001WRA?qs=DXv0QSHKF4z9CJhPXjxR%252BA%3D%3D, Fuse Type="Board Mount (Cartridge Style Excluded)", Manufacturer Part Number=0437001.WRA, Mount="Surface Mount", Packaging="Tape and Reel", Pricing 1="1=1,52000, 5=1,47000, 10=1,37600, 50=1,13860, 100=0,94880, 250=0,92508, 500=0,78276, 1000=0,68788 (USD)", RoHS=Yes, Stock 1=5820, Supplier 1=Digi-Key, Voltage Rating (DC)=63V
J1: library part J_Pinheader_1x13, "THT Vertical Pin Header WR-PHD, Pitch 2.54 mm, Single Row, 13 pins", Color=Black, Manufacturer="Wurth Electronics", Category=Connectors, ComponentLink1Description=http://www.farnell.com/cad/1737268.pdf?src-supplier=Element14, ComponentLink1URL=http://www.farnell.com/cad/1737268.pdf?src-supplier=Element14, ComponentLink2Description=https://katalog.we-online.de/em/datasheet/6130xx11121.pdf?src-supplier=Digi-Key, ComponentLink2URL=https://katalog.we-online.de/em/datasheet/6130xx11121.pdf?src-supplier=Digi-Key, Connector Type="Male Pin", Contact Material=Copper, Contact Mating Length=0.236inch, Contact Plating=Gold, Contact Type="Male Pin", Gender=Male, Lead Free="Lead Free", Manufacturer 1="Wurth Electronics", Manufacturer Part Number=61301311121, Mount="Through Hole", Mounting Technology="Through Hole", Number of Contacts=12, Number of Positions=12, Number of Rows=1, Packaging=Bulk, Pitch=0.1inch, Pricing 1="1=0,57000, 10=0,48400, 25=0,40400, 50=0,33700, 100=0,30600, 1000=0,27800 (USD)", Pricing 2="5=0,69, 100=0,358, 375=0,34, 1500=0,324, 3000=0,306 (EUR)", REACH SVHC=Unknown, Reach SVHC Compliant=Unknown, RoHS=Yes, RoHS Compliant=Yes, Series=WR-PHD, Stock 2=90, Supplier 1=Digi-Key, Supplier 2=Rs, Termination=Solder
J2: library part J_Pinheader_1x8, "THT Vertical Pin Header WR-PHD, Pitch 2.54 mm, Single Row, 12 pins", Color=Black, Manufacturer 1="Wurth Electronics", Category=Connectors, ComponentLink1Description=http://www.farnell.com/cad/1737268.pdf?src-supplier=Element14, ComponentLink1URL=http://www.farnell.com/cad/1737268.pdf?src-supplier=Element14, ComponentLink2Description=https://katalog.we-online.de/em/datasheet/6130xx11121.pdf?src-supplier=Digi-Key, ComponentLink2URL=https://katalog.we-online.de/em/datasheet/6130xx11121.pdf?src-supplier=Digi-Key, Connector Type="Male Pin", Contact Material=Copper, Contact Mating Length=0.236inch, Contact Plating=Gold, Gender=Male, Manufacturer Part Number 1=61301211121, Mount="Through Hole", Number of Contacts=12, Number of Positions=12, Number of Rows=1, Packaging=Bulk, Pitch=0.1inch, Pricing 1="1=0,57000, 10=0,48400, 25=0,40400, 50=0,33700, 100=0,30600, 1000=0,27800 (USD)", REACH SVHC=Unknown, RoHS=Yes, RoHS Compliant=Yes, Stock 1=2124, Supplier 1=Digi-Key, Termination=Solder
J3 J4: "Conn Nano-Fit Power HDR 4 POS 2.5mm Solder ST Through Hole 4 Terminal Single Port Tray", Manufacturer 1=Molex, Manufacturer Part Number 1=1053101104, Supplier Part Number 1=2820681, Category=Uncategorized, ComponentLink1Description=https://www.molex.com/pdm_docs/ps/PS-105300-100-001.pdf?src-supplier=Digi-Key, ComponentLink1URL=https://www.molex.com/pdm_docs/ps/PS-105300-100-001.pdf?src-supplier=Digi-Key, Pricing 1="1=1,43000, 10=1,18000, 50=0,74900, 100=0,72900, 500=0,71400, 1000=0,70700 (EUR)", RoHS=Yes, Stock 1=255, Supplier 1=Farnell
L101: "Multilayer Inductor, 6.8Uh, 0.6A, 0805 Rohs Compliant: Yes", Manufacturer="Wurth Electronics", Manufacturer Part Number=74479777268, Category="Fixed Inductors", Pricing 1="5=0,845, 50=0,759, 250=0,658, 500=0,569, 1500=0,528, 3000=0,514, 15000=0,498, 30000=0,48 (EUR)", RoHS=No, Stock 1=2165, Supplier 1=Farnell
L200 L201 L202 L203 L204 L205 L206 L207 L208 L209 L210 L211 L212 L213 L214: library part L_Ferrite_bead_782853561, Case Code (Imperial)=0603, Case Code (Metric)=1608, Current Rating=500mA, DC Resistance (DCR)=210mR, Manufacturer=Murata, Manufacturer Part Number=BLM18EG331TN1D, Max Operating Temperature=125°C, Min Operating Temperature=-55°C, Package Quantity=1, Supplier Part Number 1=490-5913-1-ND, Test Frequency=100MHz, Tolerance=25%, .Creator=GP, Case/Package=0603, Category="Ferrite Beads and Chips", ComponentLink1Description=https://datasheet.ciiva.com/1467/5169-1467232.pdf?src-supplier=Element14, ComponentLink1URL=https://datasheet.ciiva.com/1467/5169-1467232.pdf?src-supplier=Element14, ComponentLink2Description=https://datasheet.ciiva.com/11795/0900766b811b5866-11795405.pdf?src-supplier=RSComponents, ComponentLink2URL=https://datasheet.ciiva.com/11795/0900766b811b5866-11795405.pdf?src-supplier=RSComponents, ComponentLink3Description=https://datasheet.ciiva.com/41449/001172267-da-01-en-drossel-0603-330r-1-6x0-8mm-4000st-41449581.pdf?src-supplier=Conrad, ComponentLink3URL=https://datasheet.ciiva.com/41449/001172267-da-01-en-drossel-0603-330r-1-6x0-8mm-4000st-41449581.pdf?src-supplier=Conrad, ComponentLink4Description=https://datasheet.ciiva.com/1467/5169-1467233.pdf?src-supplier=Element14, ComponentLink4URL=https://datasheet.ciiva.com/1467/5169-1467233.pdf?src-supplier=Element14, ComponentLink5Description=https://datasheet.ciiva.com/1561/5169-1561345.pdf?src-supplier=Newark, ComponentLink5URL=https://datasheet.ciiva.com/1561/5169-1561345.pdf?src-supplier=Newark, ComponentLink6Description=https://datasheet.ciiva.com/3082/l0110s0101blm18e-3082714.pdf?src-supplier=Avnet, ComponentLink6URL=https://datasheet.ciiva.com/3082/l0110s0101blm18e-3082714.pdf?src-supplier=Avnet, ComponentLink7Description=https://datasheet.ciiva.com/6211/l0110s0101blm18e-6211470.pdf?src-supplier=Digi-Key, ComponentLink7URL=https://datasheet.ciiva.com/6211/l0110s0101blm18e-6211470.pdf?src-supplier=Digi-Key, ComponentLink8Description=https://datasheet.ciiva.com/6211/l0110s0101blm18e-6211471.pdf?src-supplier=Digi-Key, ComponentLink8URL=https://datasheet.ciiva.com/6211/l0110s0101blm18e-6211471.pdf?src-supplier=Digi-Key, Core Material=Ferrite, Depth=0.8mm, Height=0.8mm, Impedance=330R, Lead Free="Lead Free", Length=1.6mm, Material=Ferrite,Steel, Max Current Rating=500mA, Max DC Current=500mA, Number of Circuits=1, Number of Lines=1, Number of Pins=2, Packaging="Tape and Reel", Pricing 1="1=0,23000, 10=0,17500, 25=0,14520, 50=0,12520, 100=0,11260, 250=0,09508, 500=0,08508, 1000=0,07257 (USD)", REACH SVHC="No SVHC", Resistance=210mR, RoHS=Yes, RoHS Compliant=Yes, Series=BLM18E, Stock 1=20037, Supplier 1=Digi-Key, Termination=SMD/SMT, Width=0.8mm
R101 R238 R239 R240 R241 R242 R243 R244 R245 R246 R247 R248 R249 R250 R251: library part R1k-0805FTK, "Res Thick Film 0805 1K Ohm 5% 1/8W ±200ppm/°C Molded SMD SMD Paper Tape on Plastic Reel", Case Code (Imperial)=0805, Case Code (Metric)=2012, Manufacturer 1=Bourns, Max Operating Temperature=155°C, Max Power Dissipation=125mW, Min Operating Temperature=-55°C, Package Quantity=1, Resistance=1kR, Resistor Type="Thick Film", Temperature Coefficient=200ppm/°C, Tolerance=5%, Voltage Rating=150V, .Creator=GP, Case/Package=0805, Category="Chip SMD Resistors", ComponentLink1Description=https://datasheet.ciiva.com/11821/0900766b80fcdb72-11821134.pdf?src-supplier=RSComponents, ComponentLink1URL=https://datasheet.ciiva.com/11821/0900766b80fcdb72-11821134.pdf?src-supplier=RSComponents, ComponentLink2Description=https://datasheet.ciiva.com/15225/getdatasheetpartid-78155-15225381.pdf?src-supplier=Verical, ComponentLink2URL=https://datasheet.ciiva.com/15225/getdatasheetpartid-78155-15225381.pdf?src-supplier=Verical, ComponentLink3Description=https://datasheet.ciiva.com/22693/1902866-22693253.pdf?src-supplier=Element14, ComponentLink3URL=https://datasheet.ciiva.com/22693/1902866-22693253.pdf?src-supplier=Element14, ComponentLink4Description=https://datasheet.ciiva.com/7986/1856384-7986184.pdf?src-supplier=Element14, ComponentLink4URL=https://datasheet.ciiva.com/7986/1856384-7986184.pdf?src-supplier=Element14, ComponentLink5Description=https://datasheet.ciiva.com/7985/1856384-7985867.pdf?src-supplier=Element14, ComponentLink5URL=https://datasheet.ciiva.com/7985/1856384-7985867.pdf?src-supplier=Element14, ComponentLink6Description=https://datasheet.ciiva.com/30242/159chpreztr-30242765.pdf?src-supplier=Onlinecomponents.com, ComponentLink6URL=https://datasheet.ciiva.com/30242/159chpreztr-30242765.pdf?src-supplier=Onlinecomponents.com, ComponentLink7Description=https://datasheet.ciiva.com/6547/chpreztr-6547359.pdf?src-supplier=Digi-Key, ComponentLink7URL=https://datasheet.ciiva.com/6547/chpreztr-6547359.pdf?src-supplier=Digi-Key, Contact Plating=Tin, Depth=1.25mm, Features="Moisture Resistant", Height=0.5mm, Lead Free="Lead Free", Length=2mm, Manufacturer Part Number 1=CR0805-JW-102ELF, Military Standard=Not, Mount="Surface Mount", Number of Pins=2, Number of Terminations=2, Packaging="Tape and Reel", Power Rating=125mW, Pricing 1="1=0,05930, 10=0,03510, 25=0,01790, 100=0,00800, 250=0,00790, 500=0,00590, 1000=0,00360, 3000=0,00350, 6000=0,00250 (USD)", Radiation Hardening=No, REACH SVHC="No SVHC", RoHS=Yes, Stock 1=27510, Supplier 1="Arrow Electronics", Supplier Part Number 1=CR0805-JW-102ELF, Termination=SMD/SMT, Thickness=508um, Voltage Rating (DC)=150V, Width=1.25mm
R200 R201 R202 R203 R204 R205 R206 R207 R208 R209 R210 R211: library part R470-0805FTK, "Res Thick Film 0805 470 Ohm 1% 1/8W ±100ppm/°C Molded SMD SMD Paper Tape on Plastic Reel", Case Code (Imperial)=0805, Case Code (Metric)=2012, Manufacturer 1=Bourns, Max Operating Temperature=155°C, Max Power Dissipation=125mW, Min Operating Temperature=-55°C, Resistance=470R, Resistance Tolerance=1%, Resistor Type="Thick Film", Temperature Coefficient=100ppm/°C, Voltage Rating=150V, .Creator=DR, Case/Package=0805, Category="Chip SMD Resistors", ComponentLink1Description=https://datasheet.ciiva.com/11808/0900766b80fcdb72-11808686.pdf?src-supplier=RSComponents, ComponentLink1URL=https://datasheet.ciiva.com/11808/0900766b80fcdb72-11808686.pdf?src-supplier=RSComponents, ComponentLink2Description=https://datasheet.ciiva.com/7985/1856384-7985880.pdf?src-supplier=Element14, ComponentLink2URL=https://datasheet.ciiva.com/7985/1856384-7985880.pdf?src-supplier=Element14, ComponentLink3Description=https://datasheet.ciiva.com/22693/1902866-22693247.pdf?src-supplier=Element14, ComponentLink3URL=https://datasheet.ciiva.com/22693/1902866-22693247.pdf?src-supplier=Element14, ComponentLink4Description=https://datasheet.ciiva.com/5541/chpreztr-5541930.pdf?src-supplier=Mouser, ComponentLink4URL=https://datasheet.ciiva.com/5541/chpreztr-5541930.pdf?src-supplier=Mouser, Construction=Rectangular, Contact Plating=Tin, Depth=1.25mm, Features="Moisture Resistant", Height=0.5mm, Length=2mm, Manufacturer Part Number 1=CR0805-FX-4700GLF, Military Standard=Not, Mount="Surface Mount", Number of Pins=2, Number of Terminations=2, Packaging="Tape and Reel", Power Rating=125mW, Pricing 1="1=0,00990, 10=0,00980, 25=0,00950, 50=0,00940, 100=0,00930, 250=0,00920, 500=0,00910, 1000=0,00890, 3000=0,00870, 6000=0,00860 (USD)", Radiation Hardening=No, REACH SVHC="No SVHC", RoHS=Yes, Series=CR0805, Stock 1=12623, Supplier 1="Arrow Electronics", Supplier Part Number 1=CR0805-FX-4700GLF, Technology="THICK FILM", Termination=SMD/SMT, Thickness=508um, Tolerance=1%, Voltage Rating (DC)=150V
R212 R213 R214 R215 R216 R217 R218 R219 R220 R221 R222 R223: library part R15-2512FTK, "Res Thick Film 2512 15 Ohm 1% 2W ±100ppm/C Pad SMD T/R", Case Code (Imperial)=2512, Case Code (Metric)=6432, Manufacturer 1="TE Connectivity", Max Operating Temperature=155°C, Max Power Dissipation=2W, Min Operating Temperature=-55°C, Number of Resistors=1, Resistance Tolerance=1%, Resistor Type="Thick Film,Power resistor", Supplier Part Number 1=7551110P, Temperature Coefficient=100ppm/°C, Voltage Rating=250V, .Creator=DR, Case/Package=2512, Category="Chip SMD Resistors", ComponentLink1Description=Datasheet, ComponentLink1URL=https://docs.rs-online.com/8bc1/0900766b81096b90.pdf, ComponentLink2Description="Where buy it", ComponentLink2URL=https://es.rs-online.com/web/p/resistencias-de-montaje-en-superficie/7551110, ComponentLink3Description=https://datasheet.ciiva.com/25610/0900766b81096b90-25610033.pdf?src-supplier=RSComponents, ComponentLink3URL=https://datasheet.ciiva.com/25610/0900766b81096b90-25610033.pdf?src-supplier=RSComponents, ComponentLink4Description=https://datasheet.ciiva.com/46391/1610601-46391493.pdf?src-supplier=Element14, ComponentLink4URL=https://datasheet.ciiva.com/46391/1610601-46391493.pdf?src-supplier=Element14, ComponentLink5Description=https://datasheet.ciiva.com/7657/1610601-7657542.pdf?src-supplier=Element14, ComponentLink5URL=https://datasheet.ciiva.com/7657/1610601-7657542.pdf?src-supplier=Element14, Depth=3.2mm, ELV=Compliant, Features="Automotive AEC-Q200", Height=0.55mm, Length=6.3mm, Manufacturer Part Number 1=352115RFT, Mount="Surface Mount", Number of Terminations=2, Packaging="Tape and Reel", Pricing 1="10=0,64300, 250=0,62200, 1000=0,60000, 2000=0,55400, 2500=0,52100 (USD)", REACH SVHC="No SVHC", RoHS=Yes, RoHS Compliant=Yes, Series="3521, CGS", Stock 1=1, Supplier 1=RSComponents, Technology="THICK FILM", Termination=Solder, Tolerance=1%, Voltage Rating (DC)=250V
R224 R225 R226 R227 R228 R229 R230 R231 R232 R233 R234 R235 R236 R237 R312: library part R100-0805FTK, "Res Thick Film 0805 100 Ohm 1% 1/8W ±100ppm/°C Molded SMD SMD Paper Tape on Plastic Reel", Case Code (Imperial)=0805, Case Code (Metric)=2012, Manufacturer 1=Bourns, Max Operating Temperature=155°C, Max Power Dissipation=125mW, Min Operating Temperature=-55°C, Package Quantity=1, Resistance=100R, Resistance Tolerance=1%, Resistor Type="Thick Film", Temperature Coefficient=100ppm/°C, Voltage Rating=150V, .Creator=DR, Case/Package=0805, Category="Chip SMD Resistors", ComponentLink1Description=https://datasheet.ciiva.com/11809/0900766b80fcdb72-11809178.pdf?src-supplier=RSComponents, ComponentLink1URL=https://datasheet.ciiva.com/11809/0900766b80fcdb72-11809178.pdf?src-supplier=RSComponents, ComponentLink2Description=https://datasheet.ciiva.com/6547/chpreztr-6547413.pdf?src-supplier=Digi-Key, ComponentLink2URL=https://datasheet.ciiva.com/6547/chpreztr-6547413.pdf?src-supplier=Digi-Key, ComponentLink3Description=https://datasheet.ciiva.com/6547/chpreztr-6547414.pdf?src-supplier=Digi-Key, ComponentLink3URL=https://datasheet.ciiva.com/6547/chpreztr-6547414.pdf?src-supplier=Digi-Key, ComponentLink4Description=https://datasheet.ciiva.com/6547/chpreztr-6547415.pdf?src-supplier=Digi-Key, ComponentLink4URL=https://datasheet.ciiva.com/6547/chpreztr-6547415.pdf?src-supplier=Digi-Key, ComponentLink5Description=https://datasheet.ciiva.com/9120/chpreztr-9120744.pdf?src-supplier=Avnet, ComponentLink5URL=https://datasheet.ciiva.com/9120/chpreztr-9120744.pdf?src-supplier=Avnet, Construction=Rectangular, Contact Plating=Tin, Depth=1.25mm, Features="Moisture Resistant", Height=0.5mm, Length=2mm, Manufacturer Part Number 1=CR0805-FX-1000ELF, Military Standard=Not, Mount="Surface Mount", Number of Pins=2, Number of Terminations=2, Packaging="Tape and Reel", Power Rating=125mW, Pricing 1="1=0,05840, 10=0,03430, 25=0,01780, 100=0,00750, 250=0,00560, 500=0,00490, 3000=0,00470 (USD)", Radiation Hardening=No, REACH SVHC="No SVHC", RoHS=Yes, RoHS Compliant=Yes, Series=CR0805, Stock 1=49802, Supplier 1="Arrow Electronics", Supplier Part Number 1=CR0805-FX-1000ELF, Technology="THICK FILM", Termination=SMD/SMT, Thickness=508um, Tolerance=1%, Voltage Rating (DC)=150V, Width=1.25mm